# EAGLE board Whiteboardv2 (EAGLE 9.5.0)
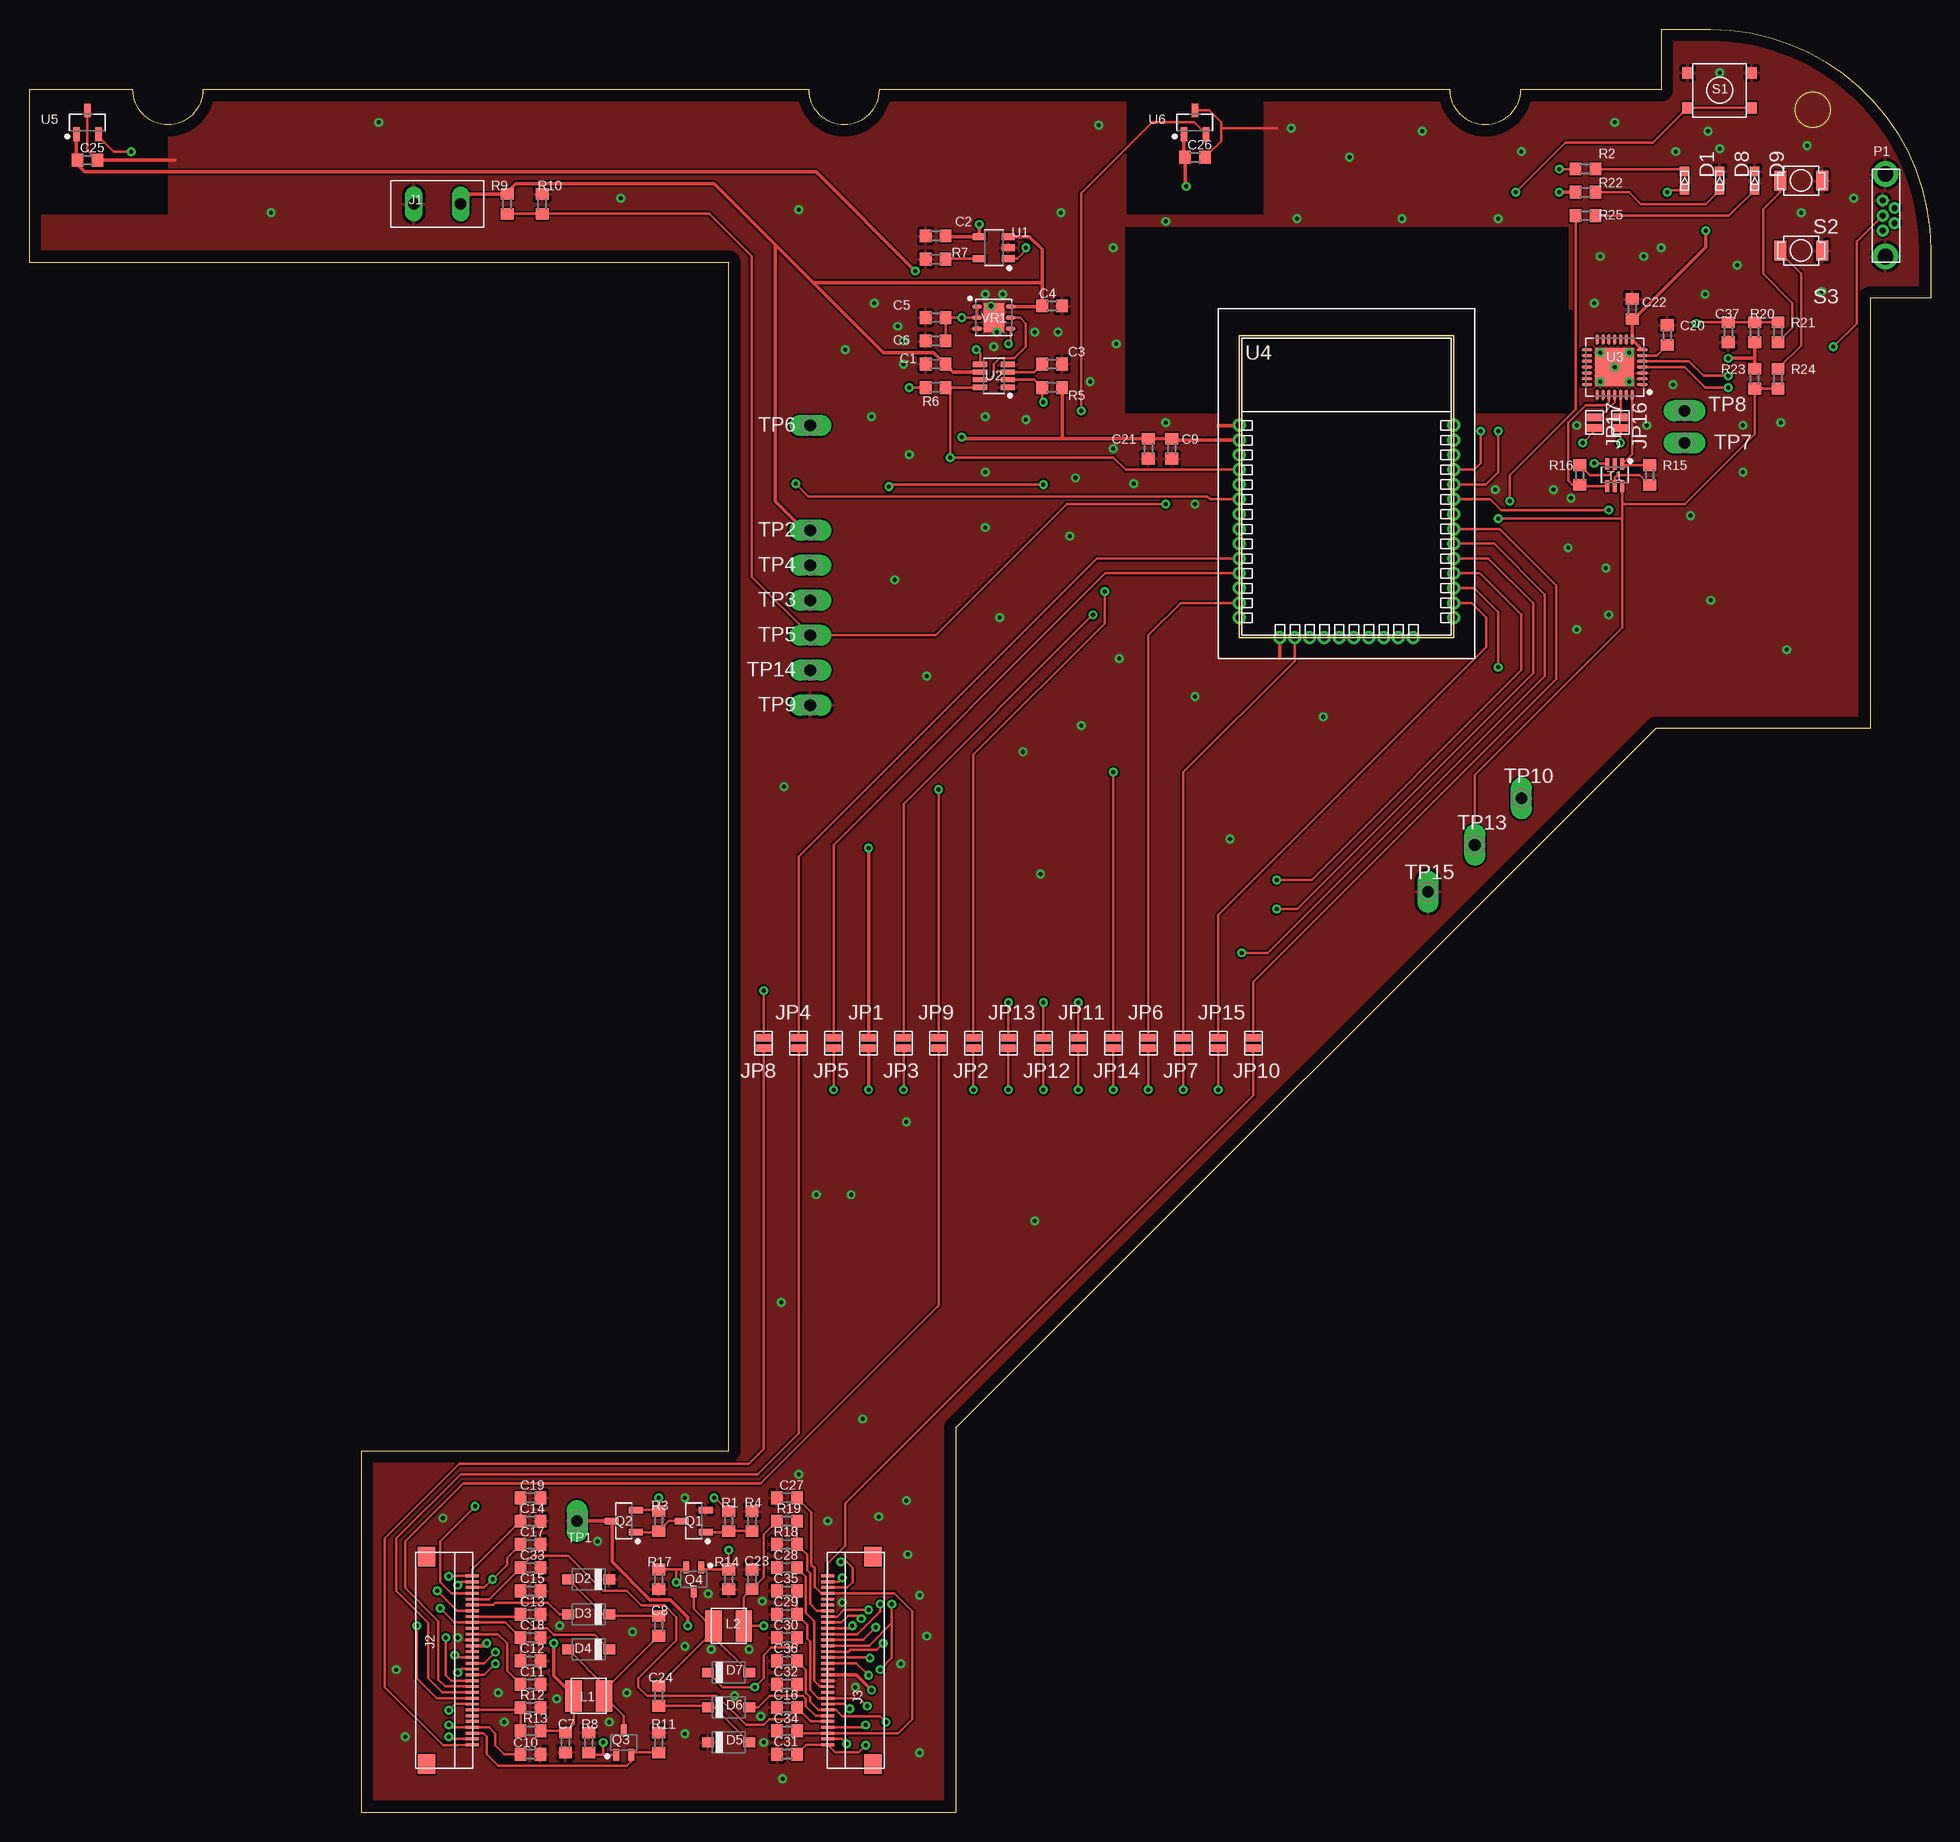
[diagram p0: board, top side]
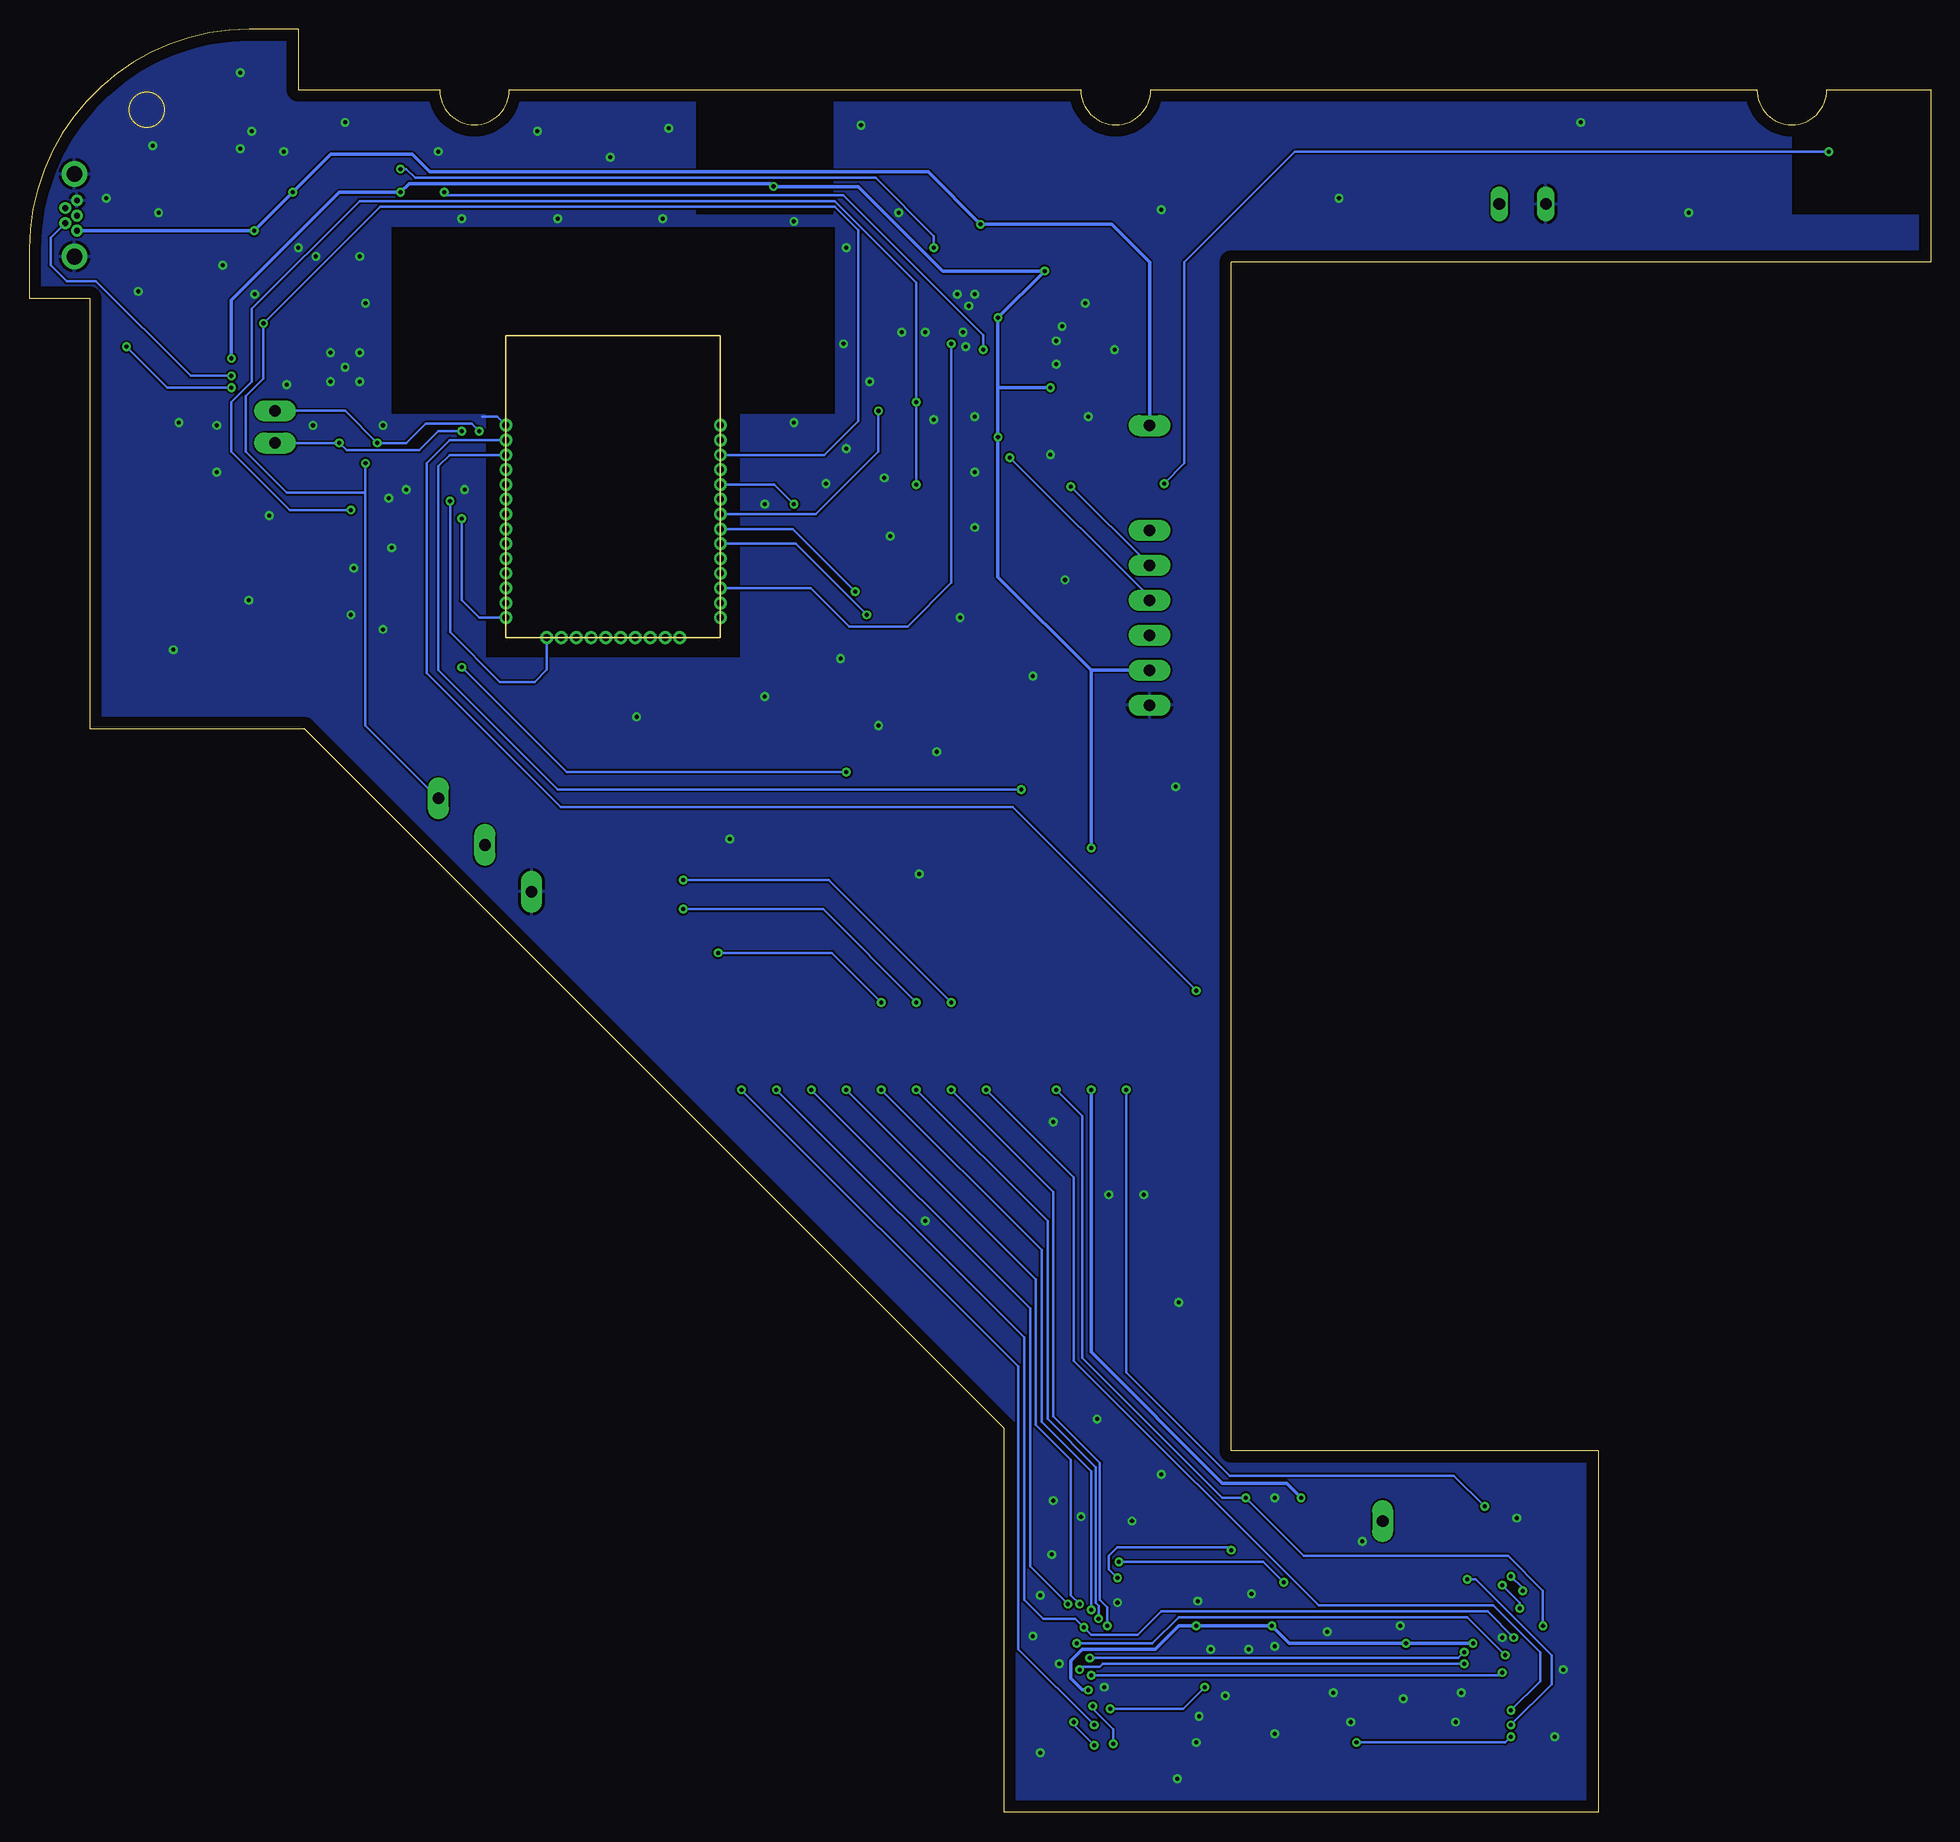
[diagram p1: board, bottom side, seen from below]

Size 163.1 x 153 mm. Coordinates in mm from the lower left corner, seen from the top.
Outline: 28.5,24 28.5,23
Outline: 140,153 144.2,153 arc-90 163.1,134.1 163.1,129.9 157.9,129.9 157.9,93 139.5,93 79.5,33 79.5,0 28.5,0 28.5,31 60,31 60,133 0,133 0,147.8 8.9,147.8 arc180 14.9,147.8 66.9,147.8 arc180 72.9,147.8 121.9,147.8 arc180 127.9,147.8 140,147.8 140,153
Copper layers (1*16): Top 0.035mm / dielectric 0.73mm / Bottom 0.035mm
Design rules "default *": minimum track width 0.2mm, minimum drill 0.35mm, track to track 6mil, track to pad 6mil, pad to pad 5mil, via to via 6mil, smd to smd 5mil, copper to edge 40mil, drill to drill 6mil, minimum pad ring 10mil, minimum via ring 8mil, stop-mask expansion 4mil, vias tented up to drill 14mil, thermal gap 10mil
Milling: area 151.5,144.6 to 154.5,147.6

## Footprints (pad centres in the part's own frame; a part is rotated, then mirrored left to right if it is on the bottom)
0603 = smd 1 x 1.1: 1 -0.85,0; 2 0.85,0
0603_LED = smd 0.8 x 0.8: A 0.8,0; K -0.8,0
SOD123 = smd 1.02 x 0.853: 1 -1.775,0; 2 1.775,0
CON_2 = drill 1 long: 1 -2,0; 2 2,0
XF2M-30 = smd 0.25 x 1.1: P$1 7.25,0; P$2 6.75,0; P$3 6.25,0; P$4 5.75,0; P$5 5.25,0; P$6 4.75,0; P$7 4.25,0; P$8 3.75,0; P$9 3.25,0; P$10 2.75,0; P$11 2.25,0; P$12 1.75,0; P$13 1.25,0; P$14 0.75,0; P$15 0.25,0; P$16 -0.25,0; P$17 -0.75,0; P$18 -1.25,0; P$19 -1.75,0; P$20 -2.25,0; P$21 -2.75,0; P$22 -3.25,0; P$23 -3.75,0; P$24 -4.25,0; P$25 -4.75,0; P$26 -5.25,0; P$27 -5.75,0; P$28 -6.25,0; P$29 -6.75,0; P$30 -7.25,0 | smd 1.7 x 1.5: PAD1 -8.9,-3.9; PAD2 8.9,-3.9
SOLDER_JUMPER = smd 0.635 x 1.27: P$1 -0.45,0; P$2 0.45,0
SRN3015_IND = smd 2.7 x 1.4: P$1 0,1.3; P$2 0,-1.3
USB3131 = drill 0.5: 1 -1.3,1; 2 -0.65,0; 3 0,1; 4 0.65,0; 5 1.3,1 | drill 1.35 pad 2.2: P$6 -3.515,0.78; P$7 3.575,0.78
SOT23-3 = smd 1.18 x 0.56: 1 -1.024,0.95; 2 -1.024,-0.95; 3 1.024,0
SOT-323 = smd 1.032 x 0.516: 1 -1.042,0.65; 2 -1.042,-0.65; 3 1.042,0
TL3313AF160QG_2 = smd 0.9 x 1: 1 -2.75,-1.5; 2 2.75,-1.5; 3 -2.75,1.5; 4 2.75,1.5
B3U-1000P = smd 1 x 1.7: P$1 -1.8,0; P$2 1.8,0
SOT23-6 = smd 1.02 x 0.36: 1 -0.955,0.65; 2 -0.955,0; 3 -0.955,-0.65; 4 0.955,-0.65; 5 0.955,0; 6 0.955,0.65
TEST_PAD = drill 1 pad 1.8 long: TP 0,0
TSOT23-5L = smd 1.119 x 0.589: 1 -1.246,0.95; 2 -1.246,0; 3 -1.246,-0.95; 4 1.246,-0.95; 5 1.246,0.95
SOT23-8 = smd 1.237 x 0.459: 1 -1.187,0.975; 2 -1.187,0.325; 3 -1.187,-0.325; 4 -1.187,-0.975; 5 1.187,-0.975; 6 1.187,-0.325; 7 1.187,0.325; 8 1.187,0.975
QFN-28 = smd 0.969 x 0.264: 1 -2.371,1.5; 2 -2.371,1; 3 -2.371,0.5; 4 -2.371,0; 5 -2.371,-0.5; 6 -2.371,-1; 7 -2.371,-1.5; 15 2.371,-1.5; 16 2.371,-1; 17 2.371,-0.5; 18 2.371,0; 19 2.371,0.5; 20 2.371,1; 21 2.371,1.5 | smd 0.264 x 0.969: 8 -1.5,-2.371; 9 -1,-2.371; 10 -0.5,-2.371; 11 0,-2.371; 12 0.5,-2.371; 13 1,-2.371; 14 1.5,-2.371; 22 1.5,2.371; 23 1,2.371; 24 0.5,2.371; 25 0,2.371; 26 -0.5,2.371; 27 -1,2.371; 28 -1.5,2.371 | smd 3.3 x 3.3: 29 0,0
ESP32-WROOM-32_EMBEDDED = drill 0.6 pad 1: P$1 -0.2,18.01; P$2 -0.2,16.74; P$3 -0.2,15.47; P$4 -0.2,14.2; P$5 -0.2,12.93; P$6 -0.2,11.66; P$7 -0.2,10.39; P$8 -0.2,9.12; P$9 -0.2,7.85; P$10 -0.2,6.58; P$11 -0.2,5.31; P$12 -0.2,4.04; P$13 -0.2,2.77; P$14 -0.2,1.5; P$15 3.285,-0.2; P$16 4.555,-0.2; P$17 5.825,-0.2; P$18 7.095,-0.2; P$19 8.365,-0.2; P$20 9.635,-0.2; P$21 10.905,-0.2; P$22 12.175,-0.2; P$23 13.445,-0.2; P$24 14.715,-0.2; P$25 18.2,1.5; P$26 18.2,2.77; P$27 18.2,4.04; P$28 18.2,5.31; P$29 18.2,6.58; P$30 18.2,7.85; P$31 18.2,9.12; P$32 18.2,10.39; P$33 18.2,11.66; P$34 18.2,12.93; P$35 18.2,14.2; P$36 18.2,15.47; P$37 18.2,16.74; P$38 18.2,18.01
DFN-6 = smd 0.86 x 0.397: 1 -1.435,0.95; 2 -1.435,0; 3 -1.435,-0.95; 4 1.435,-0.95; 5 1.435,0; 6 1.435,0.95 | smd 1.75 x 2.5: 7 0,0

## Placement (x,y rotation side)
C1  100nF  [0603]  77.75,124.25 180 top
C2  1uF  [0603]  77.75,135.25 180 top
C3  470nF  [0603]  87.75,124.25 0 top
C4  10uF  [0603]  87.75,129.25 0 top
C5  10uF  [0603]  77.75,128.25 0 top
C6  100nF  [0603]  77.75,126.25 0 top
C7  4.7uF/25V  [0603]  46,6 90 top
C8  4.7uF/25V  [0603]  54,16 270 top
C9  100nF  [0603]  98,117 270 top
C10  1uF/50V  [0603]  43,5 180 top
C11  1uF/50V  [0603]  43,11 180 top
C12  1uF/50V  [0603]  43,13 180 top
C13  1uF/50V  [0603]  43,17 180 top
C14  1uF/50V  [0603]  43,25 180 top
C15  1uF/50V  [0603]  43,19 180 top
C16  1uF/50V  [0603]  65,9 0 top
C17  1uF/50V  [0603]  43,23 180 top
C18  1uF/50V  [0603]  43,15 180 top
C19  1uF/50V  [0603]  43,27 180 top
C20  1uF  [0603]  140.5,126.75 90 top
C21  10uF  [0603]  96,117 270 top
C22  10uF  [0603]  137.5,129 90 top
C23  4.7uF/25V  [0603]  62,20 270 top
C24  4.7uF/25V  [0603]  54,10 90 top
C25  470nF  [0603]  5,141.75 0 top
C26  470nF  [0603]  100,142 0 top
C27  1uF/50V  [0603]  65,27 0 top
C28  1uF/50V  [0603]  65,21 0 top
C29  1uF/50V  [0603]  65,17 0 top
C30  1uF/50V  [0603]  65,15 0 top
C31  1uF/50V  [0603]  65,5 0 top
C32  1uF/50V  [0603]  65,11 0 top
C33  1uF/50V  [0603]  43,21 180 top
C34  1uF/50V  [0603]  65,7 0 top
C35  1uF/50V  [0603]  65,19 0 top
C36  1uF/50V  [0603]  65,13 0 top
C37  10uF  [0603]  145.75,127 270 top
D1  0603_LED  [0603_LED]  142,140 270 top
D2  MBR0530  [SOD123]  48,20 180 top
D3  MBR0530  [SOD123]  48,17 180 top
D4  MBR0530  [SOD123]  48,14 180 top
D5  MBR0530  [SOD123]  60,6 0 top
D6  MBR0530  [SOD123]  60,9 0 top
D7  MBR0530  [SOD123]  60,12 0 top
D8  0603_LED  [0603_LED]  145,140 270 top
D9  0603_LED  [0603_LED]  148,140 270 top
J1  CON_2  [CON_2]  35,138 180 top
J2  XF2M-30_CONN  [XF2M-30]  38,13.05 270 top
J3  XF2M-30_CONN  [XF2M-30]  68.5,13.05 90 top
JP1  SOLDER_JUMPER  [SOLDER_JUMPER]  72,66 270 top
JP2  SOLDER_JUMPER  [SOLDER_JUMPER]  81,66 90 top
JP3  SOLDER_JUMPER  [SOLDER_JUMPER]  75,66 90 top
JP4  SOLDER_JUMPER  [SOLDER_JUMPER]  66,66 90 top
JP5  SOLDER_JUMPER  [SOLDER_JUMPER]  69,66 90 top
JP6  SOLDER_JUMPER  [SOLDER_JUMPER]  96,66 90 top
JP7  SOLDER_JUMPER  [SOLDER_JUMPER]  99,66 90 top
JP8  SOLDER_JUMPER  [SOLDER_JUMPER]  63,66 90 top
JP9  SOLDER_JUMPER  [SOLDER_JUMPER]  78,66 90 top
JP10  SOLDER_JUMPER  [SOLDER_JUMPER]  105,66 90 top
JP11  SOLDER_JUMPER  [SOLDER_JUMPER]  90,66 90 top
JP12  SOLDER_JUMPER  [SOLDER_JUMPER]  87,66 90 top
JP13  SOLDER_JUMPER  [SOLDER_JUMPER]  84,66 90 top
JP14  SOLDER_JUMPER  [SOLDER_JUMPER]  93,66 90 top
JP15  SOLDER_JUMPER  [SOLDER_JUMPER]  102,66 90 top
JP16  SOLDER_JUMPER  [SOLDER_JUMPER]  136.5,119.25 270 top
JP17  SOLDER_JUMPER  [SOLDER_JUMPER]  134.25,119.25 270 top
L1  10uH / 1A  [SRN3015_IND]  48,10 90 top
L2  10uH / 1A  [SRN3015_IND]  60,16 270 top
P1  USB_CON_VERTICAL  [USB3131]  160,137 90 top
Q1  SS8050-G  [SOT23-3]  57,25 180 top
Q2  AO3401A  [SOT23-3]  51,25 180 top
Q3  SI1308EDL  [SOT-323]  51,6 90 top
Q4  SI1308EDL  [SOT-323]  57,20 270 top
R1  2.2K  [0603]  60,25 270 top
R2  1K  [0603]  133.5,141 0 top
R3  10K  [0603]  54,25 270 top
R4  100K  [0603]  62,25 270 top
R5  100K  [0603]  87.75,122.25 180 top
R6  100K  [0603]  77.75,122.25 0 top
R7  1.2K  [0603]  77.75,133.25 0 top
R8  10K  [0603]  48,6 270 top
R9  2K  [0603]  41,138 270 top
R10  2K  [0603]  44,138 90 top
R11  1  [0603]  54,6 270 top
R12  3  [0603]  43,9 0 top
R13  10K  [0603]  43,7 0 top
R14  10K  [0603]  60,20 90 top
R15  10K  [0603]  139,114.75 270 top
R16  10K  [0603]  133,114.75 90 top
R17  1  [0603]  54,20 90 top
R18  3  [0603]  65,23 180 top
R19  10K  [0603]  65,25 180 top
R20  10K  [0603]  148,127 270 top
R21  470  [0603]  150,127 90 top
R22  1K  [0603]  133.5,139 180 top
R23  10K  [0603]  148,123 90 top
R24  470  [0603]  150,123 270 top
R25  470  [0603]  133.5,137 180 top
S1  BUTTON_TL3313AF160QG_2  [TL3313AF160QG_2]  145,147.75 180 top
S2  BUTTON_B3U-1000P  [B3U-1000P]  152,140 180 top
S3  BUTTON_B3U-1000P  [B3U-1000P]  152,134 180 top
T1  MBT3904DW1T1G  [SOT23-6]  136,114.75 270 top
TP1  TP  [TEST_PAD]  47,25 180 top
TP2  TP  [TEST_PAD]  67,110 90 top
TP3  TP  [TEST_PAD]  67,104 90 top
TP4  TP  [TEST_PAD]  67,107 90 top
TP5  TP  [TEST_PAD]  67,101 90 top
TP6  TP  [TEST_PAD]  67,119 90 top
TP7  TP  [TEST_PAD]  142,117.5 90 top
TP8  TP  [TEST_PAD]  142,120.25 90 top
TP9  TP  [TEST_PAD]  67,95 90 top
TP10  TP  [TEST_PAD]  128,87 0 top
TP13  TP  [TEST_PAD]  124,83 0 top
TP14  TP  [TEST_PAD]  67,98 90 top
TP15  TP  [TEST_PAD]  120,79 0 top
U1  STC4054_BAT_CHARGER  [TSOT23-5L]  82.75,134.25 180 top
U2  LTC2955-1_ON/OFF_CTLR  [SOT23-8]  82.75,123.25 180 top
U3  CP2102/9  [QFN-28]  136,124 180 top
U4  ESP32-WROOM-32_EMBEDDED  [ESP32-WROOM-32_EMBEDDED]  104,101 0 top
U5  TCS40DPR  [SOT23-3]  5,145 90 top
U6  TCS40DPR  [SOT23-3]  100,145 90 top
VR1  LD39200PU33R_V-REG  [DFN-6]  82.75,128.25 0 top

## Library data of the parts
C1-C37 D1-D9 J1-J3 JP1-JP17 L1 L2 P1 Q1-Q4 R1-R25 S1-S3 T1 TP1-TP10 TP13-TP15 U1-U6 VR1 = ZHAW_BA

## Nets
3V3_EPD: C7.2 C23.2 J2.P$17 J2.P$18 J3.P$17 J3.P$18 L1.P$1 L2.P$1 Q2.3 R13.2 R19.2 TP1.TP
+3V3: C5.2 C6.2 C9.1 C21.1 C25.1 C26.1 JP1.P$1 R5.1 R6.1 R20.2 R22.2 R23.2 TP14.TP U4.P$2 U5.1 U6.1 VR1.1 VR1.2
BAT_MONITOR: R9.2 R10.1 TP5.TP U4.P$5
BUSY_M1: J2.P$8 JP2.P$1
BUSY_M2: J3.P$8 JP11.P$1
BUSY_S1: J2.P$27 JP5.P$1
BUSY_S2: J3.P$27 JP15.P$1
CHRG: R2.1 U1.1
CLK: J2.P$12 J3.P$12 JP7.P$1
CS_M1: J2.P$1 JP8.P$1
CS_M2: J3.P$11 JP14.P$1
CS_S1: J2.P$11 JP9.P$1
CS_S2: J3.P$1 JP10.P$1
D_N: P1.2 U3.5
D_P: P1.3 U3.4
DC_1: J2.P$10 JP4.P$1
DC_2: J3.P$10 JP13.P$1
DIN: J2.P$13 J3.P$13 JP6.P$1
DTR: R15.1 T1.1 U3.28
EN: C37.1 R20.1 R21.2 T1.3 TP10.TP U4.P$3
GDR1: J2.P$2 Q3.1 R8.2
GDR2: J3.P$2 Q4.1 R14.2
GND: C1.2 C2.2 C3.2 C4.2 C5.1 C6.1 C7.1 C9.2 C10.1 C11.1 C12.1 C13.1 C14.1 C15.1 C16.1 C17.1 C18.1 C19.1 C20.2 C21.2 C22.2 C23.1 C25.2 C26.2 C27.1 C28.1 C29.1 C30.1 C31.1 C32.1 C33.1 C34.1 C35.1 C36.1 C37.2 D2.1 D5.1 D8.K D9.K J1.2 J2.P$19 J3.P$19 P1.5 P1.P$6 P1.P$7 Q1.2 R4.1 R7.1 R8.1 R10.2 R11.1 R12.2 R14.1 R17.1 R18.2 S1.1 S1.2 S2.P$1 S3.P$1 TP9.TP TP15.TP U1.2 U2.1 U2.4 U3.3 U3.29 U4.P$1 U4.P$15 U4.P$38 U5.3 U6.3 VR1.3 VR1.7
IO0: R23.1 R24.2 T1.6 TP13.TP U4.P$25
IO2: R25.2 U4.P$24
LSYNC: J2.P$14 J3.P$16
M1M2_SYNC: J2.P$15 J3.P$15
M2M1_SYNC: J2.P$16 J3.P$14
MAG_POS1: U4.P$6 U5.2
MAG_POS2: U4.P$7 U6.2
N$1: R21.1 S2.P$2
N$2: JP16.P$1 U3.26
N$3: R24.1 S3.P$2
N$4: R15.2 T1.5
N$5: R16.2 T1.2
N$6: C20.1 U3.6
N$7: D8.A R22.1
N$8: D1.K R2.2
N$9: J3.P$7 R18.1 R19.1
N$10: C28.2 J3.P$20
N$11: D9.A R25.1
N$12: C8.2 D4.2 L1.P$2 Q3.3
N$13: J2.P$7 R12.1 R13.1
N$14: C8.1 D2.2 D3.1
N$15: C24.2 D7.2 L2.P$2 Q4.3
N$16: C24.1 D5.2 D6.1
N$17: Q1.1 R1.2 R4.2
N$18: Q1.3 Q2.1 R3.2
N$19: R7.2 U1.5
N$20: JP4.P$2 U4.P$10
N$21: C11.2 J2.P$20
N$22: JP3.P$2 U4.P$9
N$23: S1.3 S1.4 U2.5
N$24: JP2.P$2 U4.P$8
N$25: C3.1 U2.3
N$26: JP6.P$2 U4.P$13
N$27: JP8.P$2 U4.P$37
N$28: JP10.P$2 U4.P$31
N$29: JP9.P$2 U4.P$36
N$30: JP5.P$2 U4.P$11
N$31: JP15.P$2 U4.P$26
N$32: JP11.P$2 U4.P$30
N$33: JP12.P$2 U4.P$29
N$34: JP13.P$2 U4.P$28
N$35: JP14.P$2 U4.P$27
N$36: JP7.P$2 U4.P$16
N$37: JP1.P$2 Q2.2 R3.1
N$38: JP17.P$1 U3.25
PG: U4.P$12 VR1.4
PWR_EN: U2.7 VR1.5
RESE1: J2.P$3 Q3.2 R11.2
RESE2: J3.P$3 Q4.2 R17.2
RST_1: J2.P$9 JP3.P$1 R1.1
RST_2: J3.P$9 JP12.P$1
RTS: R16.1 T1.4 U3.24
U0RX: JP16.P$2 TP7.TP U4.P$34
U0TX: JP17.P$2 TP8.TP U4.P$35
VBAT: C1.1 C4.1 J1.1 R9.1 TP2.TP U1.3 U2.6 VR1.6
VCOM_M1M2: C16.2 C33.2 J2.P$26 J3.P$26
VGH_M1: C13.2 D4.1 J2.P$23
VGH_M2: C30.2 D7.1 J3.P$23
VGL_M1: C15.2 D3.2 J2.P$25
VGL_M2: C32.2 D6.2 J3.P$25
VSH_M1S1: C12.2 C18.2 J2.P$22 J2.P$29
VSH_M2S2: C29.2 C35.2 J3.P$22 J3.P$29
VSHR_M1S1: C10.2 C17.2 J2.P$4 J2.P$28
VSHR_M2S2: C27.2 C34.2 J3.P$4 J3.P$28
VSL_M1S1: C14.2 C19.2 J2.P$24 J2.P$30
VSL_M2S2: C31.2 C36.2 J3.P$24 J3.P$30
VUSB: C2.1 C22.1 D1.A P1.1 TP6.TP U1.4 U3.7 U3.8
~PWR_KILL: R5.2 TP4.TP U2.2 U4.P$33
~TURN_OFF: R6.2 TP3.TP U2.8 U4.P$4

## Tracks (layer width: path | path; a pad name or v marks a point on that pad's centre or on a via)
3V3_EPD  (via drill 0.35)
  Top 0.2: L1.P$1 46.7,7.55 C7.2 45.85,7 R13.2 | Q2.3 50,24.98 | v63,16 L2.P$1 61.3,18.45 C23.2 63,20.15 63,23.85 R19.2 | J3.P$18 J3.P$17
  Top 0.3: v56.5,16 56.5,16.75 55,18.25 53.25,18.25 50,21.5 50,24.98 | J2.P$17 J2.P$18 39.05,14.3 v39.25,14.5 | L1.P$1 45,11.7 v45,14.5 | Q2.3 TP1.TP | J3.P$18 70.95,11.8 v72.25,10.5
  Bottom 0.3: v39.25,14.5 v45,14.5 55,14.5 v56.5,16 v63,16 64.5,16 66.5,14 72.75,14 73.75,13 73.75,11.5 72.75,10.5 v72.25,10.5
+3V3  (via drill 0.35)
  Top 0.2: VR1.1 VR1.2 v80,128.25 C5.2 C6.2 | 99.05,142.1 C26.1 | 4.05,141.85 C25.1 4.15,141.35 | 99.15,139.5 v99.25,139.5 | R6.1 v75.5,122.25 | 88.6,117.95 88.5,117.85
  Top 0.3: U4.P$2 98.11,117.74 C9.1 C21.1 88.5,117.85 80.15,117.85 v80,118 | U6.1 99.05,142.1 | U5.1 4.05,141.85 | 4.15,141.35 4.75,140.75 67.5,140.75 v76,132.25 | R23.2 148,124.75 | 148,124.75 R20.2 | R22.2 v131.25,139 | 148,124.75 v145.75,124.75 | C26.1 99.15,139.5 | R5.1 88.6,117.95 | v72,82.75 JP1.P$1
  Bottom 0.3: 80,122.25 v80,118 80,106 72,98 | 80,122.25 v80,128.25 v76,132.25 84.75,132.25 92,139.5 v99.25,139.5 99.5,139.75 130.5,139.75 v131.25,139 136.5,139 145.75,129.75 v145.75,124.75 | TP14.TP 72,98 | v72,82.75 72,98 | v75.5,122.25 80,122.25
BAT_MONITOR  (via drill 0.35)
  Top 0.2: R9.2 R10.1 58.35,137.15 62,133.5 62,106 TP5.TP 77.75,101 89,112.25 v97.5,112.25
  Bottom 0.2: U4.P$5 99.18,113.93 v97.5,112.25
BUSY_M1  (via drill 0.35)
  Top 0.2: J2.P$8 36.55,9.3 v36,8.75 | JP2.P$1 v81,62
  Bottom 0.2: v36,8.75 33.5,11.25 33.5,13.75 37.5,17.75 52.5,17.75 73.5,38.75 73.5,54.5 v81,62
BUSY_M2  (via drill 0.35)
  Top 0.2: JP11.P$1 v90,62 | J3.P$8 69.3,16.8 69.88,17.38 v72,17.38
  Bottom 0.2: v72,17.38 72,29.25 76.25,33.5 76.25,48.25 v90,62
BUSY_S1  (via drill 0.35)
  Top 0.2: v38.25,26.25 35.25,23.25 35.25,19.75 36.2,18.8 J2.P$27 | JP5.P$1 v69,62
  Bottom 0.2: v38.25,26.25 40.88,28.88 60.13,28.88 69,37.75 v69,62
BUSY_S2  (via drill 0.35)
  Top 0.2: v71.75,7.5 71.55,7.3 J3.P$27 | JP15.P$1 v102,62
  Bottom 0.2: v71.75,7.5 78.25,14 78.25,38.25 v102,62
CHRG  (via drill 0.35)
  Top 0.2: U1.1 84.75,133.3 85.5,134.05 v85.5,134.25 | v131.25,141 R2.1
  Bottom 0.2: v131.25,141 130.75,141 130,140.25 90.5,140.25 85.5,135.25 v85.5,134.25
CLK  (via drill 0.35)
  Top 0.2: v72.62,15.88 71.55,14.8 J3.P$12 | J2.P$12 36.2,11.3 35.75,11.75 v35.75,15 | JP7.P$1 v99,62
  Bottom 0.2: v99,62 77.75,40.75 77.75,18.25 76.12,16.62 73.38,16.62 v72.62,15.88 72,15.25 68,15.25 66,17.25 38,17.25 v35.75,15
CS_M1
  Top 0.2: J2.P$1 36.75,5.75 35.5,5.75 30.5,10.75 30.5,23.5 36.88,29.88 61.71,29.88 63,31.17 JP8.P$1
CS_M2  (via drill 0.35)
  Top 0.2: v73,17.88 73,17.25 71.05,15.3 J3.P$11 | JP14.P$1 v93,62
  Bottom 0.2: v73,17.88 73.75,18.62 73.75,30.25 76.75,33.25 76.75,45.75 v93,62
CS_S1
  Top 0.2: J2.P$11 35.7,10.8 35.1,11.4 35.1,16.4 32.25,19.25 32.25,23.25 37.25,28.25 62.75,28.25 77.88,43.38 78,43.5 JP9.P$1
CS_S2
  Top 0.2: JP10.P$1 105,61.5 70,26.5 70,22.88 68.5,21.38 J3.P$1
D_N  (via drill 0.35)
  Top 0.2: U3.5 142.37,124.5 143.62,123.25 v145.75,123.25
  Bottom 0.2: P1.2 161.25,135.1 161.25,132.75 159.88,131.38 157.38,131.38 149.25,123.25 v145.75,123.25
D_P  (via drill 0.35)
  Top 0.2: P1.3 156.75,134.75 156.75,127.75 v154.75,125.75 | v145.75,122.25 143.75,122.25 142,124 U3.4
  Bottom 0.2: v154.75,125.75 151.25,122.25 v145.75,122.25
DC_1
  Top 0.2: J2.P$10 35.45,10.3 34.25,11.5 34.25,16.25 31.5,19 31.5,23.5 37,29 62.5,29 66,32.5 JP4.P$1
DC_2  (via drill 0.35)
  Top 0.2: JP13.P$1 v84,62 | v70.62,16.01 70.41,15.8 J3.P$10
  Bottom 0.2: v84,62 75.25,53.25 75.25,34 71.25,30 71.25,18.25 70.62,17.62 v70.62,16.01
DIN  (via drill 0.35)
  Top 0.2: v40,12.75 39.05,11.8 J2.P$13 | 74,16.25 v74,17.88 | JP6.P$1 v96,62 | J3.P$13 72.05,14.3 74,16.25 | v73,12.25 74,13.25 74,16.25
  Bottom 0.2: v96,62 77.25,43.25 77.25,21.12 v74,17.88 | v73,12.25 72.75,12.5 71.25,12.5 71,12.75 v40,12.75
DTR
  Top 0.2: U3.28 137.5,116.56 T1.1 136.75,115.6 R15.1
EN  (via drill 0.35)
  Top 0.2: T1.3 134.29,115.7 v134.25,115.75 | R21.2 R20.1 C37.1 143.1,127.85 v143,127.75
  Bottom 0.2: TP10.TP 134.25,93.25 134.25,113.25 | v134.25,115.75 134.25,113.25 | U4.P$3 94.89,116.47 92,119.36 92,135.75 94,137.75 133,137.75 v143,127.75 143,123 144.5,121.5 144.5,116.75 141,113.25 134.25,113.25
GDR1  (via drill 0.35)
  Top 0.2: Q3.1 49.25,4.96 | 49.25,4.96 48.19,4.96 R8.2 | v49.25,6 49.25,4.96 | v36,6.5 36.2,6.3 J2.P$2
  Bottom 0.2: v36,6.5 36.5,6 v49.25,6
GDR2  (via drill 0.35)
  Top 0.2: Q4.1 57.84,20.85 R14.2 v60,22.5 | J3.P$2 69.42,19.8 v69.75,20.12
  Bottom 0.2: v60,22.5 60.25,22.75 69.75,22.75 70.5,22 70.5,20.88 v69.75,20.12
GND  (via drill 0.35)
  Top 0.2: U5.3 5,142.6 C25.2 | U4.P$1 | U6.3 101.22,146.02 102.25,145 102.25,144.5 | 102.25,144.5 102.25,143.4 C26.2 | 102.25,144.5 107,144.5
  Top 0.3: U4.P$1 102,119 | U4.P$15 107.28,99.03 107.25,99 | C25.2 12.5,141.75
  Bottom 0.2: U4.P$38 122.94,119.75 124.25,119.75
  other vias: 75,126.25 75,124.25 70.88,10.75 45.5,16 40.25,10.25 61.75,14 60.5,10 36.75,15 62.75,8.25 63,6 51.75,15.5 51.25,10.25 58.5,14 56.25,14.25 56.25,6.75 32.25,6.5 31.5,12.25 35.5,25.25 68.5,25 74.75,12.75 134.25,129.5 142.5,111.25 147,115 143.75,130.25 146.5,132.75 140,134.25 134.75,133.5 113.25,142 152.5,143 156.5,138.5 153.75,130.5 145,149.25 135.25,106.75 86.75,80.5 64.75,88 67.5,53 70.5,53 75.25,59.25 86.25,50.75 75.25,26.75 71.5,33.75 82.75,125.75 88.5,137.25 66,137.5 50.75,138.5 20.75,137.25 30,145 74.25,105.75 89.25,109.5 88.25,127 91,122.75 90.25,93.25 77,97.5 82,110.25 82,119.75 72.25,119.75 100,95.75 111,94 103,83.5 150.75,99.75 144.25,104 138.75,119 145,142.75 40.75,7.75 45.25,9.75 49.75,7.75 48.75,23.25 66,29 56.25,27 64.5,43.75 91.75,144.75 152,137.25 144,144.25 119.5,144.25 108.25,144.5 93,134.25 93.25,126 108.75,136.75 126,136.75 128,142.5 136,145 141.25,142.5 130.75,113.5 125.75,113.5 132.25,112.75 132.75,119 134.75,122.75 137.25,122.75 137.25,125.25 134.75,125.25 136,124 141,122.5 147,119 150.25,119.25 132,108.5 132.75,101.5 135.5,102.75 94.75,114 93,117 100,112.25 89.75,114.5 97.5,119.25 70,125.5 72.5,129.5 74.5,127.5 83,127 82.5,129.25 83.5,130.25 82,130.25 85.5,119.5 86.25,127 82,115 75.5,116.5 93.5,99 83.25,102.5 85.25,91 117.75,136.75 97.5,136.5 138.5,133.5 76.38,18.62 75.38,22.12 69.75,18 72.88,25.38 77,15.12 76.38,5.12 64.62,2.88 62.88,18.12 58.25,18.75
  pour Top: 166,135 124,135 124,99 102,99 102,111 4,111 4,-3 80.25,-3 80.25,15.25 166,101
  pour Top: -6,149 -6,75 102,75 102,129 174.5,129 174.5,159 106,159 106,137 94,137 94,159 12,159 12,137 -2,137 -2,149
  pour Bottom: -6,149 -6,75 102,75 102,129 177.5,129 177.5,159 106,159 106,137 94,137 94,159 12,159 12,137 -2,137 -2,149
  pour Bottom: 168.5,135 124,135 124,99 102,99 102,111 4,111 4,-3 80.25,-3 80.25,15.25 168.5,103.5
IO0  (via drill 0.35)
  Top 0.2: R24.2 R23.1 148,118.25 142,112.25 136.65,112.25 | TP13.TP 124,89 136.65,101.65 136.65,111 | 136.65,112.25 T1.6 | 136.65,112.25 136.65,111 | v126,111 136.65,111
  Bottom 0.2: v126,111 126,104 124.5,102.5 U4.P$25
IO2  (via drill 0.35)
  Top 0.2: R25.2 132.65,120.4 127,114.75 v127,112.5
  Bottom 0.2: v127,112.5 127,101.25 122.75,97 119.75,97 118.72,98.03 U4.P$24
LSYNC  (via drill 0.35)
  Top 0.2: v36.75,12 37.05,12.3 J2.P$14 | v72,11.75 70.95,12.8 J3.P$16
  Bottom 0.2: v72,11.75 37,11.75 v36.75,12
M1M2_SYNC  (via drill 0.35)
  Top 0.2: v40,13.75 39.05,12.8 J2.P$15 | v72.12,13.25 72.08,13.3 J3.P$15
  Bottom 0.2: v40,13.75 40.5,13.25 v72.12,13.25
M2M1_SYNC  (via drill 0.35)
  Top 0.2: J2.P$16 36.7,13.3 v36.5,13.5 | v73.25,14.5 72.7,13.95 70.45,13.95 70.3,13.8 J3.P$14
  Bottom 0.2: v36.5,13.5 39.75,16.75 64.5,16.75 66.75,14.5 v73.25,14.5
MAG_POS1  (via drill 0.35)
  Top 0.2: U4.P$6 101.3,112.66 101.05,112.91 66.84,112.91 v65.75,114 | v8.75,142.48 7.25,142.48 5.95,143.78 U5.2
  Bottom 0.2: v8.75,142.48 54.53,142.48 64,133 64,115.75 v65.75,114
MAG_POS2  (via drill 0.35)
  Top 0.2: v90.25,120.25 90.25,138.93 96.32,145 99.92,145 U6.2
  Bottom 0.2: U4.P$7 95.61,111.39 90.25,116.75 v90.25,120.25
N$1
  Top 0.2: R21.1 151.25,127.4 151.25,129.5 148.75,132 148.75,137.55 150.2,139 S2.P$2
N$2
  Top 0.2: JP16.P$1 U3.26
N$3
  Top 0.2: R24.1 152,125.85 152,132 150.2,133.8 S3.P$2
N$4
  Top 0.2: R15.2 138.15,114.75 136.25,114.75 136,114.5 T1.5
N$5
  Top 0.2: T1.2 136,115.25 135.5,114.75 133.85,114.75 R16.2
N$6
  Top 0.2: U3.6 139.6,125 C20.1
N$7
  Top 0.2: R22.1 137.25,139 138.25,138 143.8,138 D8.A
N$8
  Top 0.2: R2.2 141.8,141 D1.K
N$9
  Top 0.2: R19.1 R18.1 66.75,22.1 66.75,20.75 67,20.5 67,17.88 67.58,17.3 J3.P$7
N$10
  Top 0.2: C28.2 66.62,20.22 66.62,17.12 67.35,16.4 67.35,11.27 67.83,10.8 J3.P$20
N$11
  Top 0.2: R25.1 145.8,137 D9.A
N$12
  Top 0.2: Q3.3 51,8.3 L1.P$2 49.3,10.25 49.3,10.45 | D4.2 49.3,10.93 49.3,10.45 | C8.2 49.3,10.45
N$13
  Top 0.2: R12.1 42.15,8.75 | 42.15,8.75 R13.1 | J2.P$7 42.1,8.8 42.15,8.75
N$14
  Top 0.2: D2.2 49.22,17 D3.1 49.92,16.85 C8.1
N$15
  Top 0.2: C24.2 58.7,15.55 58.7,15.75 | 58.7,15.75 L2.P$2 58.7,15.07 D7.2 | Q4.3 57,17.45 58.7,15.75
N$16
  Top 0.2: C24.1 58.08,9.15 D6.1 58.78,9 D5.2
N$17
  Top 0.2: Q1.1 59.9,24.05 R1.2 R4.2
N$18
  Top 0.2: Q2.1 53.9,24.05 R3.2 54.85,25 Q1.3
N$19
  Top 0.2: U1.5 78.65,133.3 R7.2
N$20
  Top 0.2: U4.P$10 91.58,107.58 66,82 JP4.P$2
N$21
  Top 0.2: C11.2 41,12.15 41,14.5 40.2,15.3 J2.P$20
N$22  (via drill 0.35)
  Top 0.2: v91.25,102.75 75,86.5 JP3.P$2
  Bottom 0.2: U4.P$9 97.35,108.85 v91.25,102.75
N$23  (via drill 0.35)
  Top 0.2: v81.25,125.5 81.56,125.19 U2.5 | v127.5,139 131.75,143.25 139.25,143.25 S1.4 S1.3
  Bottom 0.2: v127.5,139 127.25,138.75 93.25,138.75 81.25,126.75 v81.25,125.5
N$24  (via drill 0.35)
  Top 0.2: v92.25,104.75 92.25,102 81,90.75 JP2.P$2
  Bottom 0.2: v92.25,104.75 97.62,110.12 U4.P$8
N$25
  Top 0.2: U2.3 86.22,123.58 C3.1
N$26
  Top 0.2: U4.P$13 98.77,103.77 96,101 JP6.P$2
N$27  (via drill 0.35)
  Top 0.2: JP8.P$2 v63,70.5
  Bottom 0.2: U4.P$37 127.01,117.74 129,115.75 129,97.75 117.5,86.25 78.75,86.25 v63,70.5
N$28
  Top 0.2: U4.P$31 126.13,110.12 131,105.25 131,97.25 105,71.25 JP10.P$2
N$29  (via drill 0.35)
  Top 0.2: JP9.P$2 v78,87.75
  Bottom 0.2: U4.P$36 127.03,116.47 128,115.5 128,98 117.75,87.75 v78,87.75
N$30
  Top 0.2: U4.P$11 92.31,106.31 69,83 JP5.P$2
N$31
  Top 0.2: U4.P$26 123.73,103.77 125,102.5 125,100 102,77 JP15.P$2
N$32  (via drill 0.35)
  Top 0.2: U4.P$30 125.65,108.85 130,104.5 130,97.5 106.25,73.75 v104,73.75 | JP11.P$2 v90,69.5
  Bottom 0.2: v104,73.75 94.25,73.75 v90,69.5
N$33  (via drill 0.35)
  Top 0.2: U4.P$29 125.17,107.58 129,103.75 129,97.75 108.75,77.5 v107,77.5 | JP12.P$2 v87,69.5
  Bottom 0.2: v107,77.5 95,77.5 v87,69.5
N$34  (via drill 0.35)
  Top 0.2: U4.P$28 124.44,106.31 128,102.75 128,98 110,80 v107,80 | JP13.P$2 v84,69.5
  Bottom 0.2: v107,80 94.5,80 v84,69.5
N$35  (via drill 0.35)
  Top 0.2: U4.P$27 123.96,105.04 126,103 v126,98.25 | JP14.P$2 v93,89.25
  Bottom 0.2: v93,89.25 117,89.25 v126,98.25
N$36
  Top 0.2: U4.P$16 108.56,98.8 99,89.25 JP7.P$2
N$37  (via drill 0.35)
  Top 0.2: Q2.2 53.9,25.95 R3.1
  Top 0.3: R3.1 v54,27 | JP1.P$2 v72,62
  Bottom 0.3: v54,27 55.25,28.25 60.75,28.25 72,39.5 v72,62
N$38
  Top 0.2: U3.25 136,121 134.7,119.7 JP17.P$1
PG  (via drill 0.35)
  Top 0.2: v84,126 84.19,126.19 VR1.4
  Bottom 0.2: U4.P$12 96.04,105.04 92.75,101.75 87.75,101.75 84,105.5 v84,126
PWR_EN
  Top 0.2: U2.7 82.42,122.92 82.75,123.25 82.75,124.25 83.25,124.75 84.5,124.75 85.5,125.75 85.5,127.75 85,128.25 VR1.5
RESE1
  Top 0.2: R11.2 51.84,5.15 Q3.2 51.65,4.4 51.25,4 40.25,4 39.25,5 39.25,6.5 38.95,6.8 J2.P$3
RESE2  (via drill 0.35)
  Top 0.2: R17.2 55.5,20.85 | 55.5,20.85 56.16,20.85 Q4.2 | v55.5,19.75 55.5,20.85 | v69.62,21.5 70.12,21.5 70.62,21 70.62,19.75 70.17,19.3 J3.P$3
  Bottom 0.2: v69.62,21.5 57.25,21.5 v55.5,19.75
RST_1  (via drill 0.35)
  Top 0.2: R1.1 58.85,27 v58.75,27 | J2.P$9 34.95,9.8 33.25,11.5 v33.25,16 | JP3.P$1 v75,62
  Bottom 0.2: v75,62 72.75,59.75 72.75,39 60.75,27 v58.75,27 53.75,22 36.25,22 33.25,19 v33.25,16
RST_2  (via drill 0.35)
  Top 0.2: JP12.P$1 v87,62 | J3.P$9 69.67,16.3 70.25,16.88 71.12,16.88 v71.38,16.62
  Bottom 0.2: v87,62 75.75,50.75 75.75,33.75 71.62,29.62 71.62,18 71.37,17.74 71.37,17.11 71.38,17.11 v71.38,16.62
RTS
  Top 0.2: 133.1,113.8 T1.4 | U3.24 135.5,121 135.25,120.75 133.5,120.75 132,119.25 132,114.25 132.35,113.9 R16.1
  Top 0.3: R16.1 133.1,113.8
U0RX  (via drill 0.35)
  Top 0.2: v126,118.5 126,115 124.93,113.93 U4.P$34 | v136.5,117.5 JP16.P$2
  Bottom 0.2: v126,118.5 128,118.5 129.63,116.87 135.87,116.87 v136.5,117.5 TP7.TP
U0TX  (via drill 0.35)
  Top 0.2: U4.P$35 123.95,115.2 124.5,115.75 v124.5,118.5 | JP17.P$2 134.25,118.5 v133.25,117.5
  Bottom 0.2: TP8.TP 136,120.25 v133.25,117.5 130.75,117.5 129.1,119.15 125.15,119.15 v124.5,118.5
VBAT
  Top 0.2: 86.85,129.2 C4.1 | 41,139 R9.1
  Top 0.3: U2.6 79.28,123.58 C1.1 77.6,125.25 73.25,125.25 67.25,131.25 | U1.3 85.8,135.2 86.9,134.1 86.9,131.25 | 86.9,131.25 C4.1 | J1.1 37.85,138.85 R9.1 | VR1.6 86.85,129.2 | 41,139 41.75,139.75 58.75,139.75 64,134.5 | 67.25,131.25 64,134.5 | 64,134.5 64,112.5 66.5,110 TP2.TP | 86.9,131.25 67.25,131.25
VCOM_M1M2
  Top 0.2: J2.P$26 39.45,18.3 C33.2 43.15,22 46.25,22 49.25,19 51.25,19 52.5,17.75 54.51,17.75 55.5,16.76 55.5,14.75 52.25,11.5 52.25,10.75 53,10 59,10 61.5,7.5 63,7.5 63.5,8 64.85,8 C16.2 67.05,7.8 J3.P$26
VGH_M1
  Top 0.2: J2.P$23 41.95,16.8 C13.2 43.35,15.8 44.45,15.8 45.01,15.25 48.53,15.25 D4.1
VGH_M2  (via drill 0.35)
  Top 0.2: D7.1 59.47,10.75 v62.25,10.75 63,11.5 63,13.5 63.65,14.15 65.85,14.15 C30.2 | J3.P$23 69.95,9.3 70,9.25 v70.38,8.88
  Bottom 0.2: v70.38,8.88 64.12,8.88 v62.25,10.75
VGL_M1
  Top 0.2: D3.2 45.5,17 44.5,18 42.25,18 | J2.P$25 39.8,17.8 40,18 42.25,18 | C15.2 42.25,18.9 42.25,18
VGL_M2
  Top 0.2: D6.2 62.53,9 63.53,10 65.88,10 | 65.88,10 66.38,10 66.62,9.75 66.62,9.12 67.45,8.3 J3.P$25 | C32.2 65.85,10.03 65.88,10
VSH_M1S1  (via drill 0.35)
  Top 0.2: C12.2 C18.2 40.85,16.3 J2.P$22 36.45,16.3 v35.25,17.5 | J2.P$29 37.05,19.8 v36.75,19.5
  Bottom 0.2: v36.75,19.5 35.25,18 v35.25,17.5
VSH_M2S2  (via drill 0.35)
  Top 0.2: C35.2 C29.2 66.75,16.1 66.75,14.88 67,14.62 67,10.5 67.7,9.8 J3.P$22 71.2,9.8 v71.88,9.12 | J3.P$29 69.7,6.3 v70.12,5.88
  Bottom 0.2: v70.12,5.88 70.12,7.12 71.88,8.88 v71.88,9.12
VSHR_M1S1  (via drill 0.35)
  Top 0.2: C10.2 40.75,5 40,5.75 40,6.75 39.45,7.3 J2.P$4 36.2,7.3 v36,7.5 | J2.P$28 39.05,19.3 v39.75,20 41,21.25 41,21.85 C17.2
  Bottom 0.2: v36,7.5 32.5,11 32.5,13.5 39,20 v39.75,20
VSHR_M2S2
  Top 0.2: C27.2 67.1,25.75 67.1,21.25 67.38,20.98 67.38,19.38 67.95,18.8 J3.P$4 74.2,18.8 75.75,17.25 75.75,8 74.55,6.8 J3.P$28 66.05,6.8 C34.2
VSL_M1S1  (via drill 0.35)
  Top 0.2: C19.2 C14.2 38,20.85 J2.P$30 36.05,20.3 v36,20.25 | v35,19 36.7,17.3 J2.P$24
  Bottom 0.2: v36,20.25 35,19.25 v35,19
VSL_M2S2  (via drill 0.35)
  Top 0.2: C36.2 66.61,12.24 66.61,10.26 67,9.88 67,9.5 67.7,8.8 J3.P$24 69.2,8.8 69.75,8.25 73,8.25 v73.5,7.75 | C31.2 66.65,5.8 J3.P$30 69.12,5.18 71.17,5.18 v71.75,5.75
  Bottom 0.2: v73.5,7.75 73.5,7.5 v71.75,5.75
VUSB  (via drill 0.35)
  Top 0.2: 78.65,135.2 C2.1 | 137.5,128 C22.1 | v81.5,136.25 | v140.5,139 140.7,139.2 D1.A
  Top 0.3: 78.65,135.2 U1.4 v81.5,136.25 | U3.7 U3.8 137.5,128 143.8,134.3 v143.8,135.7
  Bottom 0.3: TP6.TP 67,133 70.25,136.25 v81.5,136.25 86,140.75 128.75,140.75 130.25,142.25 137.25,142.25 v140.5,139 v143.8,135.7 P1.1
~PWR_KILL  (via drill 0.35)
  Top 0.2: U2.2 86.22,122.92 R5.2 86.9,121.1 v87,121 | v87,113.93 73.93,113.93 v73.75,113.75 | v135.5,111.75 126.25,111.75 125.34,112.66 U4.P$33
  Bottom 0.2: TP4.TP v73.75,113.75 | v87,113.93 v87,121 87,131.25 94,138.25 134.75,138.25 144,129 144,122.75 145.75,121 145.75,116.75 140.75,111.75 v135.5,111.75
~TURN_OFF  (via drill 0.35)
  Top 0.2: U2.8 81.54,122.25 R6.2 79,121.85 v79,116.25 93,116.25 94.05,115.2 U4.P$4
  Bottom 0.2: v79,116.25 67,104.25 TP3.TP

## Text on the board
tStop: Whiteboard v2 / BA MagicTrick / ZHAW SoE, 2021 | TOP
bStop: BOT